# EAGLE board FT231X-USBserial (EAGLE 7.7.0)
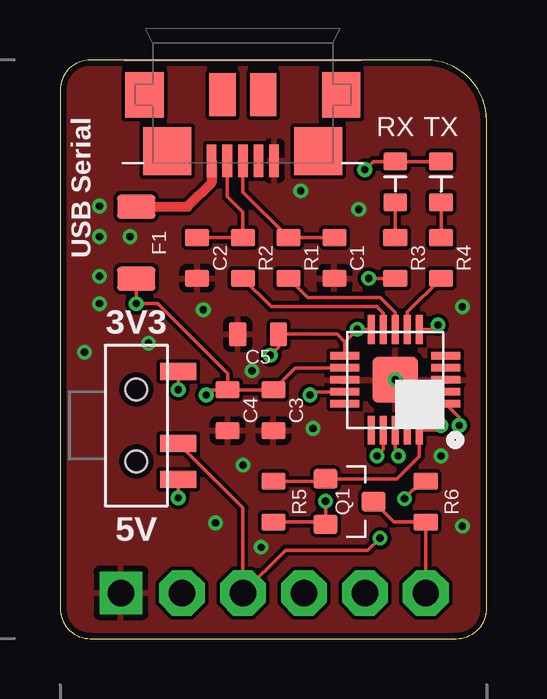
[diagram p0: board, top side]
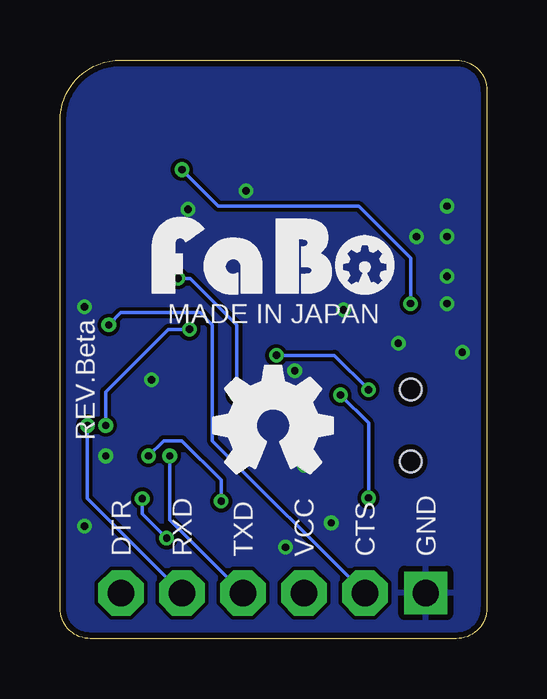
[diagram p1: board, bottom side, seen from below]

Size 17.78 x 24.13 mm. Coordinates in mm from the lower left corner, seen from the top.
Outline: 17.78,1.27 17.78,21.59 arc90 15.24,24.13 1.27,24.13 arc90 0,22.86 0,1.27 arc90 1.27,0 16.51,0 arc90 17.78,1.27
Copper layers (1*16): Top 0.035mm / dielectric 1.5mm / Bottom 0.035mm
Design rules "Elecrow_angle": minimum track width 6mil, minimum drill 12mil, track to track 6mil, track to pad 6mil, pad to pad 6mil, via to via 6mil, smd to smd 0mil, copper to edge 10mil, drill to drill 10mil, minimum pad ring 10mil, minimum via ring 6mil, stop-mask expansion 2mil, vias tented up to drill 100mil, thermal gap 10mil

## Footprints (pad centres in the part's own frame; a part is rotated, then mirrored left to right if it is on the bottom)
0603-NARROW = smd 0.71 x 1: 1 -0.85,0; 2 0.85,0
PIN_1X6 = drill 1.1 pad 1.778 square: 1 -6.35,0 | drill 1.1 pad 1.9 octagon: 2 -3.81,0; 3 -1.27,0; 4 1.27,0; 5 3.81,0; 6 6.35,0
NANOSMDC035F = smd 1 x 1.6: 1 -1.5,0; 2 1.5,0
QFN-20_FT231X = smd 1.2 x 0.3: 1 -2.1,1; 2 -2.1,0.5; 3 -2.1,0; 4 -2.1,-0.5; 5 -2.1,-1; 11 2.1,-1; 12 2.1,-0.5; 13 2.1,0; 14 2.1,0.5; 15 2.1,1 | smd 0.3 x 1.2: 6 -1,-2.1; 7 -0.5,-2.1; 8 0,-2.1; 9 0.5,-2.1; 10 1,-2.1; 16 1,2.1; 17 0.5,2.1; 18 0,2.1; 19 -0.5,2.1; 20 -1,2.1 | smd 1.9 x 1.9: 21 0,0
0603-NARROW' = smd 0.75 x 1: ANODE -0.85,0; CATHODE 0.85,0
SOT23-3 = smd 0.8 x 1: 1 -0.95,-1; 2 0.95,-1; 3 0,1
SSSS810701 = smd 0.7 x 1.5: 1 -2.25,1.75; 2 0.75,1.75; 3 2.25,1.75 | hole 0.9: -1.5,0; 1.5,0
ZX62R-B-5P = smd 0.4 x 1.35: 1 1.3,4.2; 2 0.65,4.2; 3 0,4.2; 4 -0.65,4.2; 5 -1.3,4.2 | smd 2 x 2: 6 3.15,3.8; 7 -3.15,3.8 | smd 1.6 x 1.9: 8 4.1,1.45; 11 -4.1,1.45 | smd 1.1 x 1.8: 9 0.85,1.45; 10 -0.85,1.45

## Placement (x,y rotation side)
C1  47pF  [0603-NARROW]  11.43,15.88 90 top
C2  47pF  [0603-NARROW]  5.71,15.88 90 top
C3  0.1uF  [0603-NARROW]  8.89,9.53 90 top
C4  4.7uF  [0603-NARROW]  6.99,9.53 90 top
C5  0.1uF  [0603-NARROW]  8.26,12.7 0 top
CN3  [PIN_1X6]  8.89,1.91 0 top
F1  [NANOSMDC035F]  3.17,16.51 270 top
IC1  FT231XQ  [QFN-20_FT231X]  13.97,10.79 180 top
LED1  RX GREEN  [0603-NARROW']  13.97,19.05 270 top
LED2  TX BLUE  [0603-NARROW']  15.88,19.05 270 top
Q1  [SOT23-3]  12.06,5.71 270 top
R1  27  [0603-NARROW]  9.53,15.88 270 top
R2  27  [0603-NARROW]  7.62,15.88 270 top
R3  1k  [0603-NARROW]  13.97,15.88 90 top
R4  1k  [0603-NARROW]  15.88,15.88 90 top
R5  10k  [0603-NARROW]  8.89,5.71 90 top
R6  10k  [0603-NARROW]  15.24,5.71 90 top
S1  [SSSS810701]  3.17,8.89 270 top
U$2  [LOGO_FABO_MS_BOTTOM]  8.89,13.97 0 top
U$3  [LOGO_OSHW_M_BOTTOM]  8.89,8.89 0 top
USB1  [ZX62R-B-5P]  7.62,24.13 180 top

## Library data of the parts
C1-C5 = FaBo-Capacitor
CN3 = FaBo-PIN
F1 = FaBo-Parts
IC1 USB1 = FaBo-USB
LED1 LED2 = FaBo-LED
Q1 = FaBo-etc
R1-R6 = FaBo-Resistors
S1 = FaBo-Switch
U$2 U$3 = FaBo-Logo

## Nets
3V3: C5.2 IC1.10 IC1.11 IC1.20 Q1.1 R5.2 S1.1
5V: C3.2 C4.2 F1.2 IC1.12 LED1.ANODE LED2.ANODE S1.3
CBUS1: IC1.14 R3.1
CBUS2: IC1.7 R4.1
CTS: CN3.2 IC1.6
DTR: IC1.18 Q1.2 R5.1
DTROUT: CN3.6 Q1.3 R6.1
GND: C1.1 C2.1 C3.1 C4.1 C5.1 CN3.1 IC1.3 IC1.13 IC1.21 USB1.5
N$3: C2.2 R2.1 USB1.2
N$4: C1.2 R1.1 USB1.3
N$33: LED1.CATHODE R3.2
N$35: LED2.CATHODE R4.2
RXD: CN3.5 IC1.1
TXD: CN3.4 IC1.17
USBDM: IC1.9 R2.2
USBDP: IC1.8 R1.2
VBUS: F1.1 USB1.1
VOUT: CN3.3 R6.2 S1.2

## Tracks (layer width: path | path; a pad name or v marks a point on that pad's centre or on a via)
3V3  (via drill 0.3)
  Top 0.152: IC1.10 v12.39,12.89 11.87,12.38 | IC1.11 11.87,12.38 | 11.87,12.38 11.55,12.7 C5.2 9.11,12.15 v8.76,11.81 | v15.88,8.89 15.68,8.7 IC1.20 14.97,7.6 14.03,6.67 Q1.1 10.96,6.57 R5.2 | S1.1 v4.92,10.39
  Bottom 0.152: v8.76,11.81 6.35,11.81 v4.92,10.39 | v15.88,8.89 15.88,10.29 13.27,12.89 v12.39,12.89
5V  (via drill 0.3)
  Top 0.152: IC1.12 9.81,11.29 C3.2 C4.2 | LED2.ANODE LED1.ANODE 13.04,19.9 v12.7,19.56 | C4.2 6.99,11.05 4.06,13.97 v3.17,13.97 F1.2 | C4.2 6.31,10.38 v6.1,10.16 | S1.3 v4.92,5.87
  Bottom 0.152: v12.7,19.56 11.18,18.03 5.33,18.03 3.17,15.88 v3.17,13.97 | v6.1,10.16 4.92,8.99 v4.92,5.87
CBUS1  (via drill 0.3)
  Top 0.152: R3.1 v12.87,15.03 | IC1.14 10.55,10.29 v10.41,10.16
  Bottom 0.152: v12.87,15.03 12.36,15.03 10.41,13.08 v10.41,10.16
CBUS2
  Top 0.152: IC1.7 14.47,13.62 R4.1
CTS  (via drill 0.3)
  Top 0.152: IC1.6 15.56,12.89 v15.75,13.08
  Bottom 0.152: v15.75,13.08 15.24,13.59 11.94,13.59 11.43,13.08 11.43,8.26 CN3.2
DTR  (via drill 0.3)
  Top 0.152: R5.1 10.96,4.87 Q1.2 v11.06,5.73 | IC1.18 13.97,7.75 v14.1,7.62
  Bottom 0.152: v11.06,5.73 11.06,6.62 12.7,8.26 13.46,8.26 v14.1,7.62
DTROUT
  Top 0.152: Q1.3 13.91,4.87 R6.1 CN3.6
GND  (via drill 0.3)
  other vias: 7.62,7.24 13.97,10.79 10.54,8.76 16.76,13.84 15.88,7.62 16.76,4.7 8.38,3.81 6.48,4.83 10.03,18.67 12.45,17.91 2.92,16.76 1.65,18.03 1.65,16.76 1.65,15.11 5.97,13.72 3.68,12.32 1.65,13.97 1.02,11.94 8,11.18
  pour Bottom: 0,0 17.78,0 17.78,24.13 0,24.13
  pour Top: 0,0 17.78,0 17.78,24.13 0,24.13
N$3
  Top 0.152: USB1.2 6.97,18.43 7.62,17.78 R2.1 C2.2
N$4
  Top 0.152: USB1.3 7.62,18.63 R1.1 C1.2
N$33
  Top 0.152: LED1.CATHODE R3.2
N$35
  Top 0.152: LED2.CATHODE R4.2
RXD  (via drill 0.3)
  Top 0.152: IC1.1 16.64,9.23 v16.64,8.89
  Bottom 0.152: CN3.5 16.64,5.84 v16.64,8.89
TXD  (via drill 0.3)
  Top 0.152: IC1.17 13.47,7.88 v13.21,7.62
  Bottom 0.152: CN3.4 13.21,4.95 v13.21,7.62
USBDM
  Top 0.152: IC1.9 13.47,13.58 13.21,13.84 8.8,13.84 R2.2
USBDP
  Top 0.152: IC1.8 13.97,13.59 13.34,14.22 10.33,14.22 R1.2
VBUS
  Top 0.406: USB1.1 6.32,19.02 5.31,18.01 F1.1
VOUT  (via drill 0.3)
  Top 0.152: R6.2 15.07,6.57 v14.35,5.84 | v13.34,4.19 12.83,3.68 9.4,3.68 CN3.3 7.62,5.45 7.37,5.7 7.23,5.83 S1.2
  Bottom 0.152: v14.35,5.84 14.35,5.21 v13.34,4.19

## Text on the board
tPlace: RX | TX | USB Serial | 3V3 | 5V
bPlace: MADE IN JAPAN | REV.Beta | GND | CTS | VCC | TXD | RXD | DTR